# Altium PCB Ports.PcbDoc
Units mm, origin at the board's own origin, x right, y up, seen from the top; angles counter-clockwise.
Board outline 101.6 x 101.6 mm, 4 copper layers (Top Layer, 3.3V, GND, Bottom Layer), stack 0.603 mm thick; 14 components, 21 nets, 80 pads, 0 vias.
Unrouted connection lines stored in the file: 26.
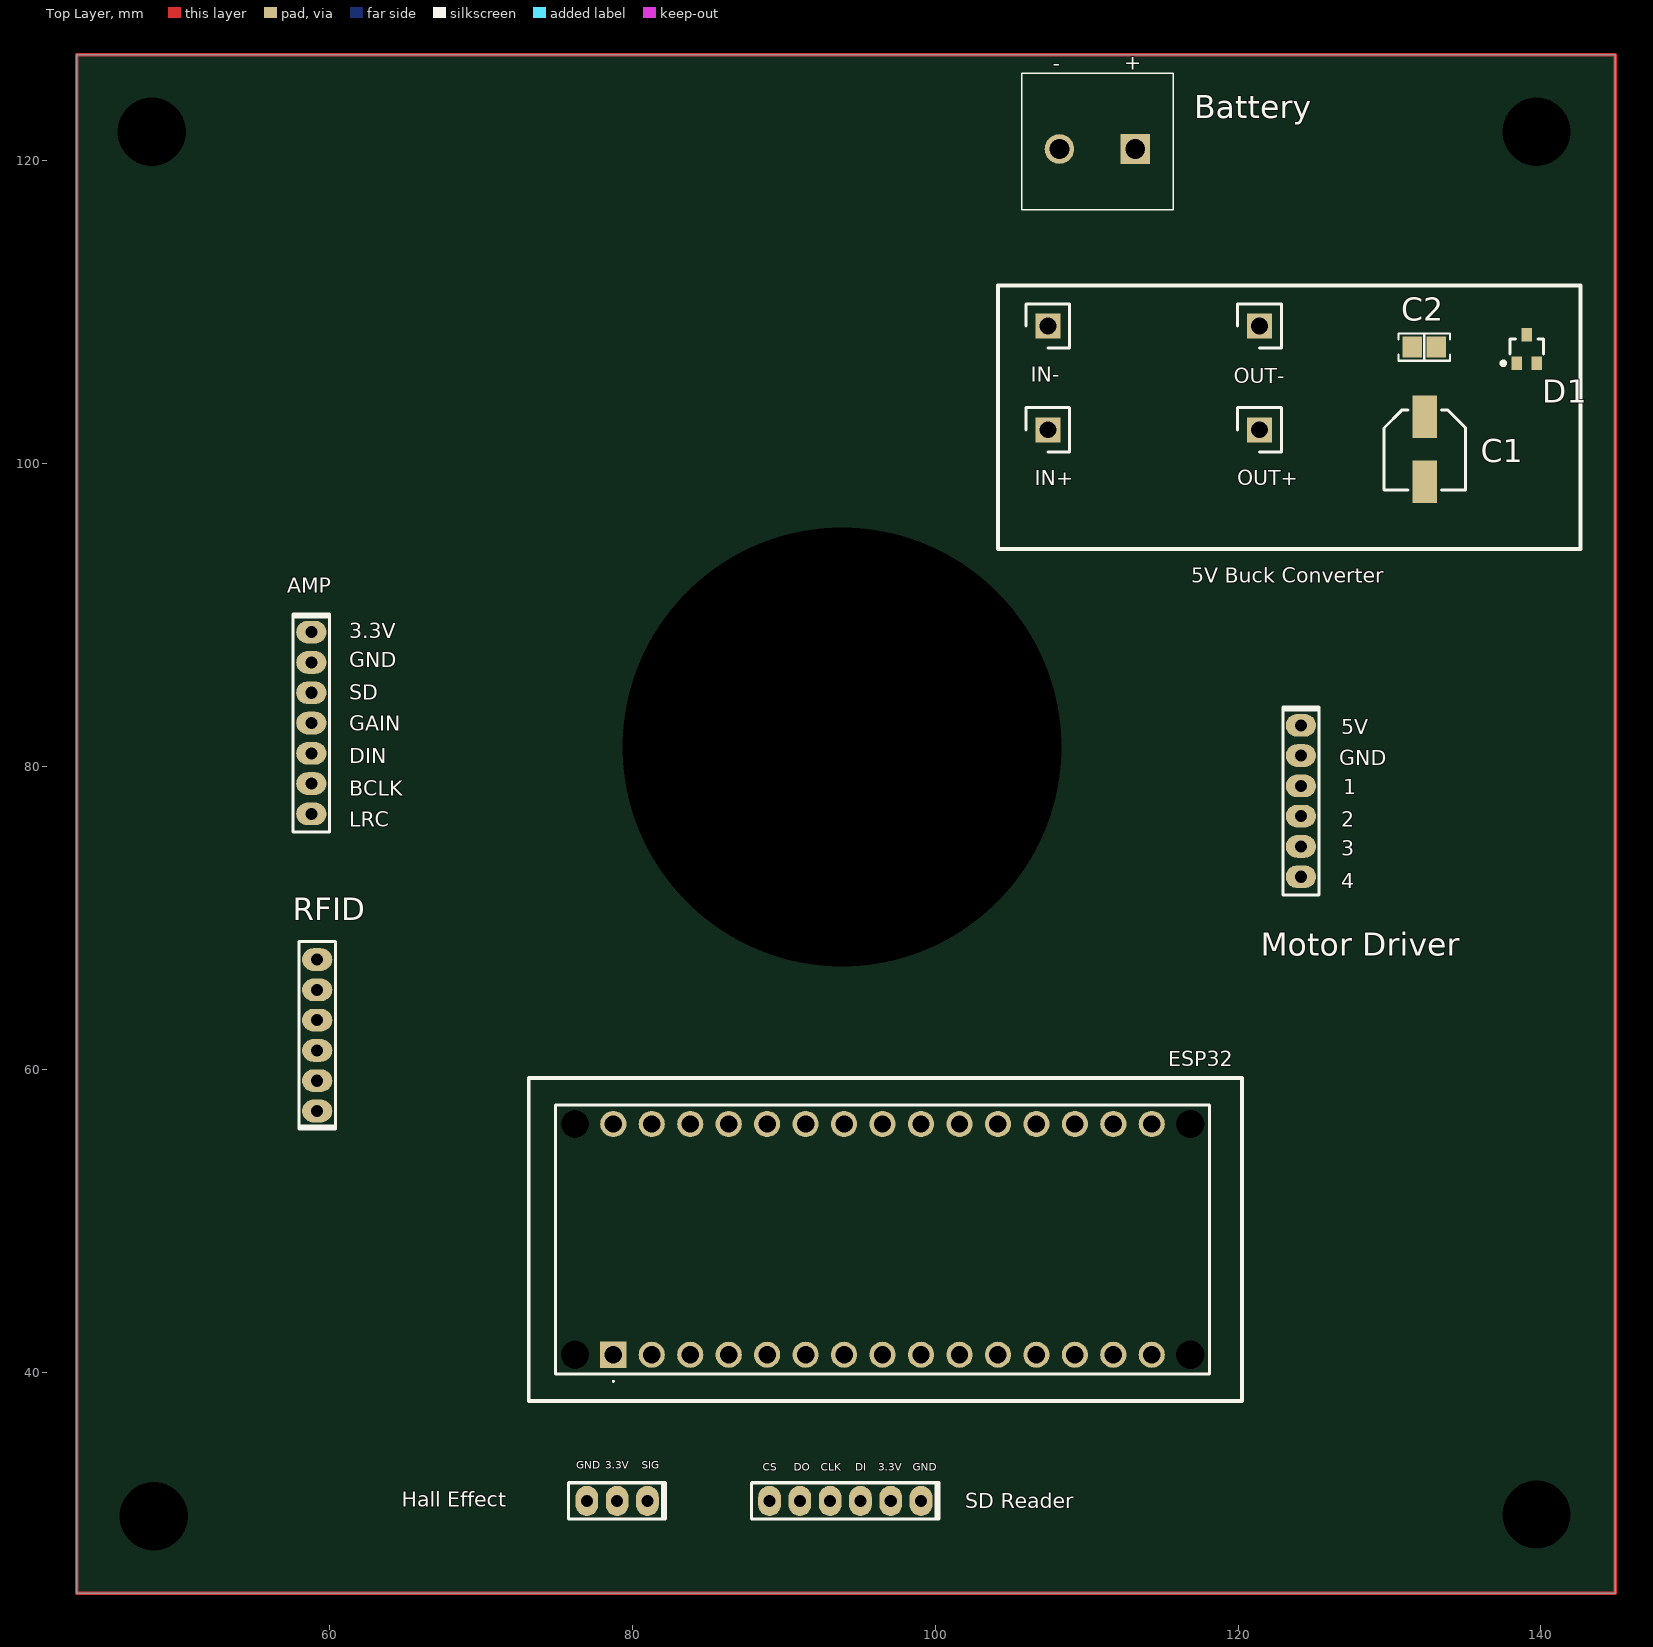
[diagram p0: Top Layer view]
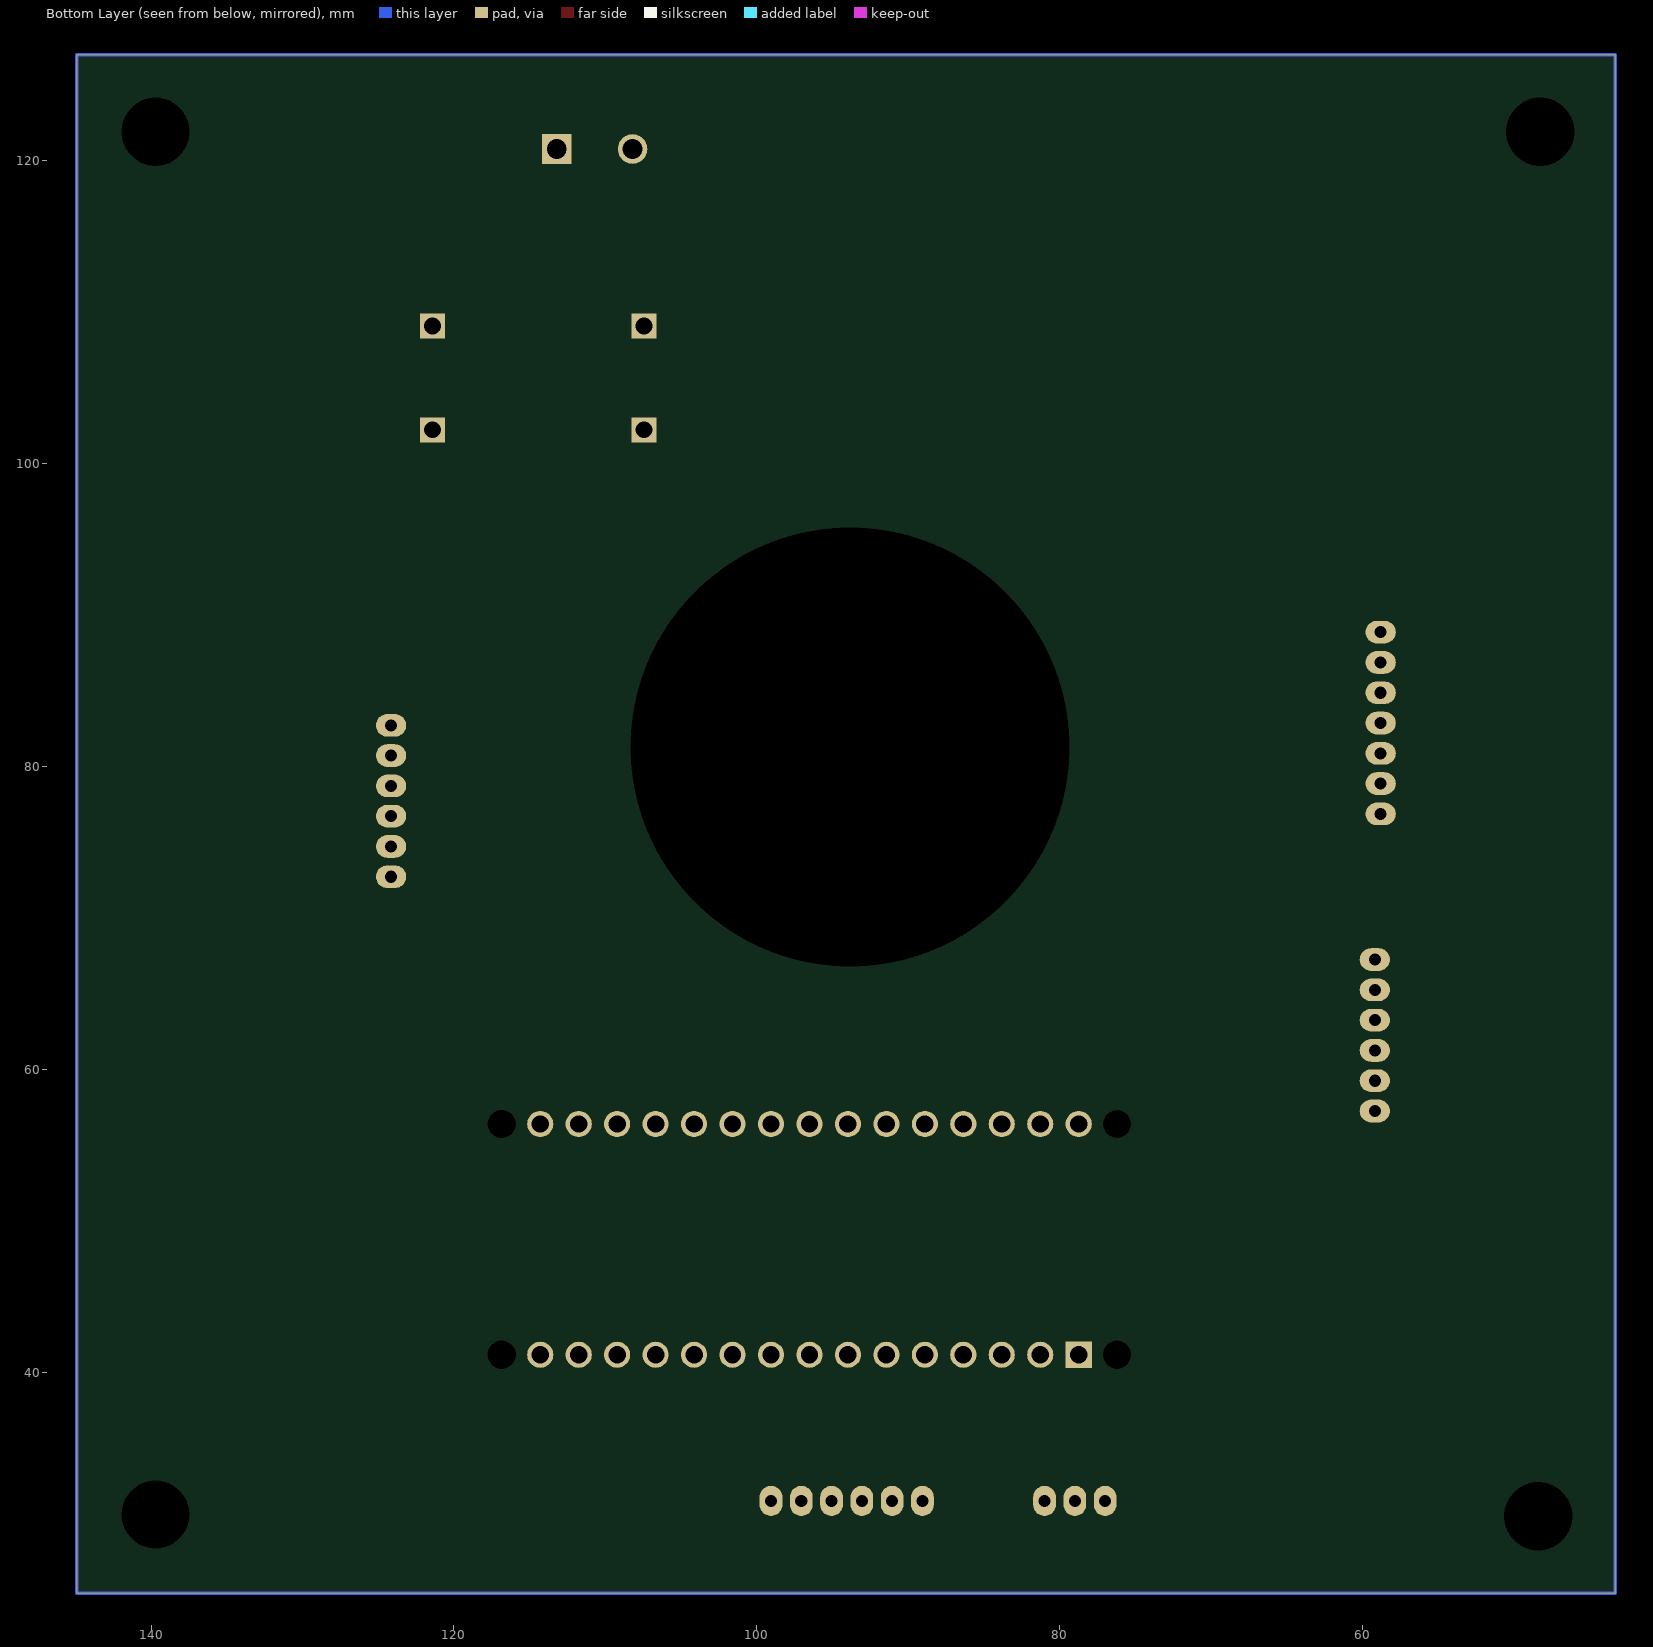
[diagram p1: Bottom Layer view, seen from below]
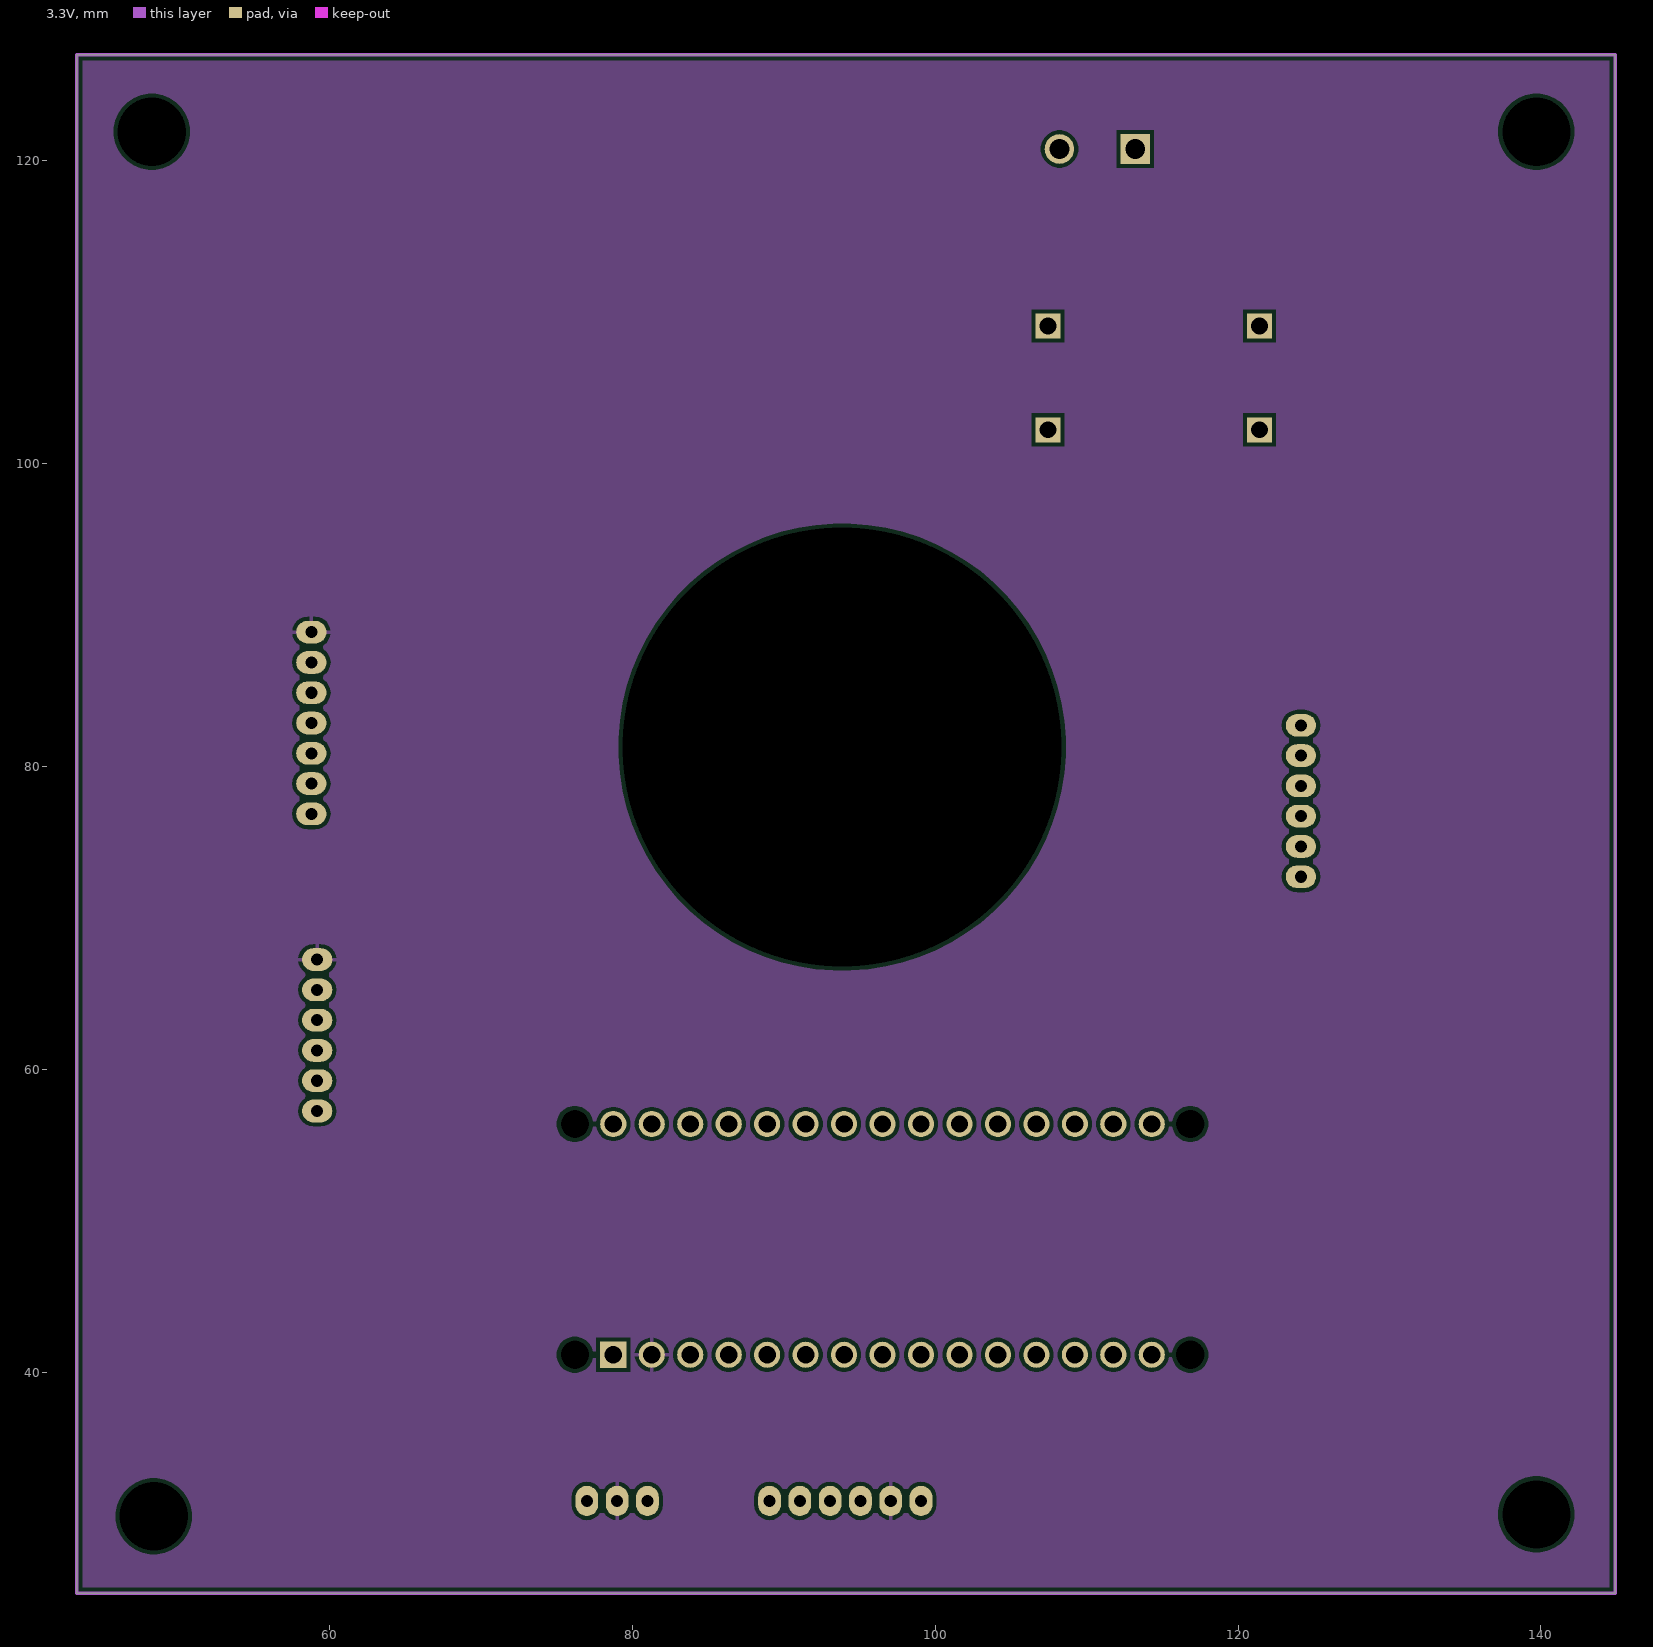
[diagram p2: 3.3V]
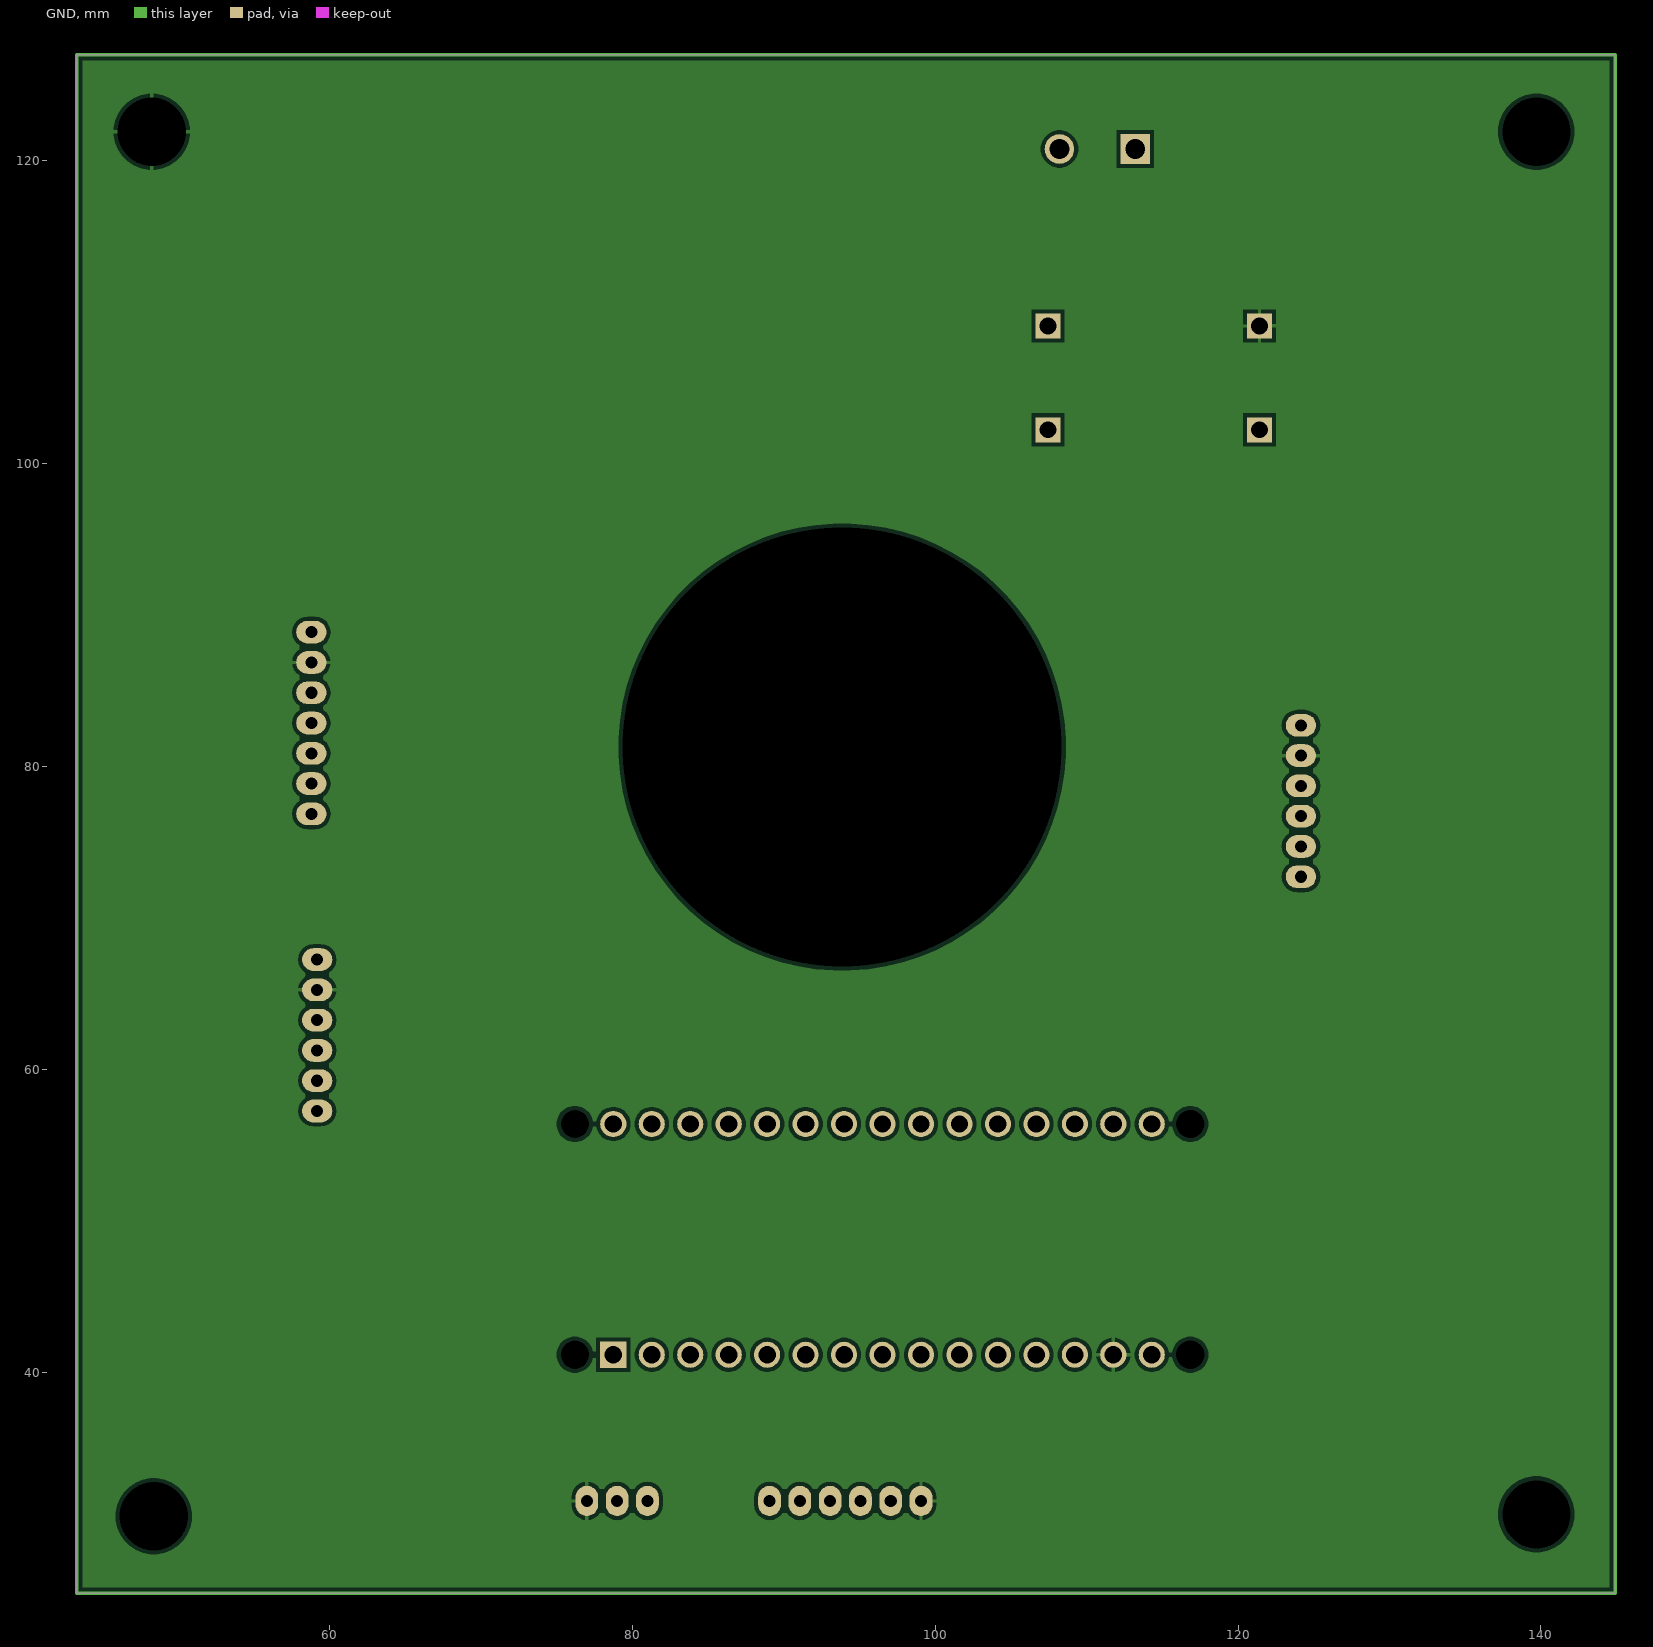
[diagram p3: GND]

## Layer stack, top to bottom
Top Solder: solder mask 0.0102, Solder Resist, Dk 3.5
Top Layer: signal copper 0.0356
Dielectric 2: prepreg 0.0711, PP-006, Dk 4.1
3.3V: signal copper 0.035
Dielectric 1: dielectric 0.32, FR-4, Dk 4.8
GND: signal copper 0.035
Dielectric 3: prepreg 0.0711, PP-006, Dk 4.1
Bottom Layer: signal copper 0.0356
Bottom Solder: solder mask 0.0102, Solder Resist, Dk 3.5

## Board outline
43.307,25.4 43.307,127 144.907,127 144.907,25.4

## Design rules (kind name [scope] priority, off if disabled: settings)
Clearance [All] p1: gap=0.254 ignorepadtopadclearanceinfootprint=FALSE
PolygonConnect [All] p1: connectstyle=Relief reliefconductorwidth=0.254 reliefentries=4 polygonreliefangle="90 Angle" airgapwidth=0.254
RoutingVias [All] p1: holewidth=0.711 width=1.27 viastyle="Through Hole" minholewidth=0.711 minwidth=1.27 maxholewidth=0.711 maxwidth=1.27
SolderMaskExpansion [All] p1: expansion=0 istentingtop=FALSE
Width [All] p1: maxlimit=0.254 minlimit=0.254 preferedwidth=0.254
30 further rules are at their usual default settings.

## Components (designator, comment, footprint, x,y, rotation, side; value= is the part's Value field where it differs from the comment)
AMP "NPPN071BFCN-RC" "SULLINS NPPN071BFCN" 58.801,82.868 r270 top
Battery "1935161" 1935161 113.204,120.777 r180 top
C1 "100 µF" "CAP ALSMD 5.3MM H5.4MM" 132.334,100.956 r270 top
C2 "0.1µF" "CAP 0805_2012" 132.296,107.696 r0 top
D1 "BZX84W-B6V2F" "DIODES SOT-323-3" 139.065,107.569 r90 top
ESP32 "ABX00083" ABX00083 78.74,41.148 r0 top
"Hall Effect" "NPPN031BFCN-RC" "SULLINS NPPN031BFCN" 78.994,31.496 r180 top
IN+ "PH1-01-UA" HDRV1W64P0X254_1X1_254X250X888P 107.442,102.235 r90 top
IN- "PH1-01-UA" HDRV1W64P0X254_1X1_254X250X888P 107.442,109.093 r90 top
"Motor Driver" "NPPN061BFCN-RC" "SULLINS NPPN061BFCN" 124.152,77.717 r270 top
OUT+ "PH1-01-UA" HDRV1W64P0X254_1X1_254X250X888P 121.412,102.235 r90 top
OUT- "PH1-01-UA" HDRV1W64P0X254_1X1_254X250X888P 121.412,109.093 r90 top
RFID "NPPN061BFCN-RC" "SULLINS NPPN061BFCN" 59.182,62.246 r90 top
"SD Reader" "NPPN061BFCN-RC" "SULLINS NPPN061BFCN" 94.06,31.496 r180 top

## Footprints (in the part's own frame and the unit in brackets; to place one, negate y for a bottom-side part, rotate by r counter-clockwise, add the part's x,y. Pads: shape width x height; smd on the part's side, far side on the other; paste and mask are expansions set on the pad)
1935161 [mm]
  rect 1.95x1.95 hole 1.3: 1(0,0)
  round 1.95 hole 1.3: 2(5,0)
  silkscreen extent -2.5,-5 7.5,4, body extent -2.64,-5 8.03,4, height 11.3
ABX00083 [mm]
  rect 1.725x1.725 hole 1.15: 1(0,0)
  round 1.725 hole 1.15: 2(2.54,0) 3(5.08,0) 4(7.62,0) 5(10.16,0) 6(12.7,0) 7(15.24,0) 8(17.78,0) 9(20.32,0) 10(22.86,0) 11(25.4,0) 12(27.94,0) 13(30.48,0) 14(33.02,0) 15(35.56,0) 16(35.56,15.24) 17(33.02,15.24) 18(30.48,15.24) 19(27.94,15.24) 20(25.4,15.24) 21(22.86,15.24) 22(20.32,15.24) 23(17.78,15.24) 24(15.24,15.24) 25(12.7,15.24) 26(10.16,15.24) 27(7.62,15.24) 28(5.08,15.24) 29(2.54,15.24) 30(0,15.24)
  round 0.93 hole 1.86 unplated: MH1(-2.54,0) MH2(38.1,0) MH3(38.1,15.24) MH4(-2.54,15.24)
  silkscreen extent -3.81,-1.8 39.37,16.51
"CAP 0805_2012" [mm] "Chip Capacitor, 2-Leads, Body 2.00x1.20mm, IPC Medium Density"
  rect 1.3x1.4 smd: 1(-0.8,0) 2(0.8,0)
  silkscreen extent -1.7,-0.9 1.7,0.9, body extent -1,-0.64 1,0.64, height 1.26
"CAP ALSMD 5.3MM H5.4MM" [mm] "Aluminum Electrolytic Capacitor, Body 5.30x5.30x5.40mm, IPC Low Density"
  rect 2.8x1.6 smd: 1(-2.15,0) 2(2.15,0)
  silkscreen extent -2.6,-2.7 2.7,2.7, body extent -2.95,-2.7 2.95,2.7, height 5.4
"DIODES SOT-323-3" [mm] "SOT323, 3-Leads, Body 2.00x2.10mm, Pitch 0.65mm, IPC Medium Density"
  rect 0.9x0.7 smd: 1(-0.95,0.65) 2(0.95,0) 3(-0.95,-0.65)
  silkscreen extent -1.07,-1.1 0.67,1.67, body extent -1.06,-1 1.06,1, height 1
HDRV1W64P0X254_1X1_254X250X888P [mm]
  rect 1.65x1.65 hole 1.1: 1(0,0)
  silkscreen extent -1.46,-1.44 1.46,1.44, body extent -1.27,-1.25 1.27,1.25, height 8.88
"SULLINS NPPN031BFCN" [mm]
  oval 1.5x2 hole 0.8: 1(-2,0) 2(0,0) 3(2,0)
  silkscreen extent -3.2,-1.2 3.2,1.2, body extent -3.25,-1.2 3.25,1.2, height 4.41
"SULLINS NPPN061BFCN" [mm]
  oval 1.5x2 hole 0.8: 1(-5,0) 2(-3,0) 3(-1,0) 4(1,0) 5(3,0) 6(5,0)
  silkscreen extent -6.2,-1.2 6.2,1.2, body extent -6.25,-1.2 6.25,1.2, height 4.41
"SULLINS NPPN071BFCN" [mm]
  oval 1.5x2 hole 0.8: 1(-6,0) 2(-4,0) 3(-2,0) 4(0,0) 5(2,0) 6(4,0) 7(6,0)
  silkscreen extent -7.2,-1.2 7.2,1.2, body extent -7.25,-1.2 7.25,1.2, height 4.41

## Part data
AMP: "CONN HDR 7POS 0.079 GOLD PCB", Current Rating (Amps)=2A, Insulation Color=Black, Manufacturer="Sullins Connector Solutions", Material Flammability Rating="UL94 V-0", Operating Temperature="-40°C ~ 105°C", Supplier Part Number 1=S5751-07-ND, ComponentLink1Description=Datasheet, ComponentLink1URL=https://drawings-pdf.s3.amazonaws.com/10483.pdf, ComponentLink2Description="DigiKey Link", ComponentLink2URL=https://www.digikey.com/en/products/detail/sullins-connector-solutions/NPPN071BFCN-RC/804809, Connector Type=Header, Contact Finish - Mating=Gold, Contact Finish - Post=Gold, Contact Finish Thickness - Mating=Flash, Contact Length - Post="0.094\" (2.40mm)", Contact Type="Female Socket", Fastening Type=Push-Pull, Insulation Height="0.173\" (4.40mm)", LastUpdated="6/21/2022 2:43:39 PM", Lifecycle Status=Active, Minimum Order=1, Mounting Type="Through Hole", Number of Positions=7, Number of Positions Loaded=All, Number of Rows=1, Packaging=Tube, Part Number=NPPN071BFCN-RC, Part Status=Active, Pitch - Mating="0.079\" (2.00mm)", Price=0.42, Series=-, Style="Board to Board", Supplier 1=DigiKey, Termination=Solder
Battery: "Connector", Manufacturer_Name="Phoenix Contact", Mouser Part Number=651-1935161, Arrow Part Number=1935161, Arrow Price/Stock=https://www.arrow.com/en/products/1935161/phoenix-contact?utm_currency=USD&region=nac, Datasheet Link=https://www.phoenixcontact.com/en-us/products/printed-circuit-board-terminal-pt-15-2-50-h-1935161?type=pdf, Height=11.55mm, Manufacturer_Part_Number=1935161, Mouser Price/Stock=https://www.mouser.co.uk/ProductDetail/Phoenix-Contact/1935161?qs=W3wJikR1%252BS6eKzfFl8Rbew%3D%3D
C1: library part 865090142005, "CAP ALUM 100UF 20% 6.3V SMD", Device Package="Radial, Can - SMD", Lifetime @ Temp.="1000 Hrs @ 85°C", Manufacturer="Würth Elektronik", Operating Temperature="-40°C ~ 85°C", Ripple Current @ High Frequency="105 mA @ 100 kHz", Ripple Current @ Low Frequency="70 mA @ 120 Hz", Supplier Part Number 1=732-8389-1-ND, Tolerance=±20%, Voltage - Rated="6.3 V", Applications="General Purpose", Capacitance="100 µF", ComponentLink1Description=Datasheet, ComponentLink1URL=https://katalog.we-online.de/pbs/datasheet/865090142005.pdf, ComponentLink2Description="DigiKey Link", ComponentLink2URL=https://www.digikey.com/en/products/detail/würth-elektronik/865090142005/5727984, Height - Seated (Max)="0.217\" (5.50mm)", LastUpdated="4/5/2026 8:30:07 PM", Lifecycle Status=Active, Minimum Order=1, Mounting Type="Surface Mount", Package / Case="Radial, Can - SMD", Packaging=TapeAndReel, Part Number=865090142005, Part Status=Active, partid=7916, Polarization=Polar, Price=0.13, Series=WCAP-ASLU, Size / Dimension="0.197\" Dia (5.00mm)", Supplier 1=DigiKey, Surface Mount Land Size="0.209\" L x 0.209\" W (5.30mm x 5.30mm)"
C2: library part 08056C104JAZ2A, "CAP CER 0.1UF 6.3V X7R 0805", Device Package="0805 (2012 Metric)", Manufacturer="AVX Corporation", Operating Temperature="-55°C ~ 125°C", Supplier Part Number 1=478-11914-1-ND, Temperature Coefficient=X7R, Tolerance=±5%, Voltage - Rated=6.3V, Applications="Boardflex Sensitive", Capacitance=0.1µF, ComponentLink1Description=Datasheet, ComponentLink1URL=http://datasheets.avx.com/FlexitermMLCC.pdf, ComponentLink2Description="DigiKey Link", ComponentLink2URL=http://digikey.com/product-detail/en/avx-corporation/08056C104JAZ2A/478-11914-1-ND/8573550, Features="Soft Termination", LastUpdated="9/2/2020 1:04:11 AM", Lifecycle Status=Active, Minimum Order=1, Mounting Type="Surface Mount, MLCC", Package / Case="0805 (2012 Metric)", Packaging=TapeAndReel, Part Number=08056C104JAZ2A, Part Status=Active, partid=16783, Price=0.08, Series=FLEXITERM®, Size / Dimension="0.079\" L x 0.049\" W (2.01mm x 1.25mm)", Supplier 1=DigiKey
D1: "DIODE ZENER 6.2V 275MW SOT323", Current - Reverse Leakage @ Vr="3 µA @ 4 V", Manufacturer="Nexperia USA Inc.", Operating Temperature="150°C (TJ)", Package / Case="SC-70, SOT-323", Power - Max="275 mW", Supplier Device Package=SOT-323, Supplier Part Number 1=1727-8280-1-ND, Tolerance=±2%, Voltage - Forward (Vf) (Max) @ If="900 mV @ 10 mA", Voltage - Zener (Nom) (Vz)="6.2 V", ComponentLink1Description=Datasheet, ComponentLink1URL=https://assets.nexperia.com/documents/data-sheet/BZX84W_SER.pdf, ComponentLink2Description="DigiKey Link", ComponentLink2URL=https://www.digikey.com/en/products/detail/nexperia-usa-inc/BZX84W-B6V2F/9380695, Impedance (Max) (Zzt)="10 Ohms", LastUpdated="4/5/2026 8:40:51 PM", Lifecycle Status=Active, Minimum Order=1, Mounting Type="Surface Mount", Packaging=TapeAndReel, Part Number=BZX84W-B6V2F, Part Status=Active, partid=809, Price=0.02, Series=BZX84W, Supplier 1=DigiKey
ESP32: "Integrated Circuit", Manufacturer_Name=Arduino, Mouser Part Number=782-ABX00083, Arrow Part Number=ABX00083, Arrow Price/Stock=https://www.arrow.com/en/products/abx00083/arduino-corporation.html?utm_currency=USD&region=nac, Datasheet Link=https://docs.arduino.cc/resources/datasheets/ABX00083-datasheet.pdf, Manufacturer_Part_Number=ABX00083, Mouser Price/Stock=https://www.mouser.co.uk/ProductDetail/Arduino/ABX00083?qs=ulEaXIWI0c8OkA6u7pnNRA%3D%3D
"Hall Effect": "CONN HDR 3POS 0.079 GOLD PCB", Current Rating (Amps)=2A, Insulation Color=Black, Manufacturer="Sullins Connector Solutions", Material Flammability Rating="UL94 V-0", Operating Temperature="-40°C ~ 105°C", Supplier Part Number 1=S5751-03-ND, ComponentLink1Description=Datasheet, ComponentLink1URL=https://drawings-pdf.s3.amazonaws.com/10483.pdf, ComponentLink2Description="DigiKey Link", ComponentLink2URL=https://www.digikey.com/en/products/detail/sullins-connector-solutions/NPPN031BFCN-RC/804805, Connector Type=Header, Contact Finish - Mating=Gold, Contact Finish - Post=Gold, Contact Finish Thickness - Mating=Flash, Contact Length - Post="0.094\" (2.40mm)", Contact Type="Female Socket", Fastening Type=Push-Pull, Insulation Height="0.173\" (4.40mm)", LastUpdated="6/21/2022 2:42:20 PM", Lifecycle Status=Active, Minimum Order=1, Mounting Type="Through Hole", Number of Positions=3, Number of Positions Loaded=All, Number of Rows=1, Packaging=Tube, Part Number=NPPN031BFCN-RC, Part Status=Active, Pitch - Mating="0.079\" (2.00mm)", Price=0.25, Series=-, Style="Board to Board", Supplier 1=DigiKey, Termination=Solder
IN+ IN- OUT+ OUT-: "Connector", Manufacturer_Name="Adam Tech", Mouser Part Number=737-PH1-01-UA, Arrow Part Number=PH1-01-UA, Arrow Price/Stock=https://www.arrow.com/en/products/ph1-01-ua/adam-tech?utm_currency=USD&region=nac, Datasheet Link=https://app.adam-tech.com/products/download/data_sheet/201605/ph1-xx-ua-data-sheet.pdf, Height=8.881mm, Manufacturer_Part_Number=PH1-01-UA, Mouser Price/Stock=https://www.mouser.co.uk/ProductDetail/Adam-Tech/PH1-01-UA?qs=HoCaDK9Nz5d5oFPj3mhtaw%3D%3D
"Motor Driver" RFID "SD Reader": "CONN HDR 6POS 0.079 GOLD PCB", Current Rating (Amps)=2A, Insulation Color=Black, Manufacturer="Sullins Connector Solutions", Material Flammability Rating="UL94 V-0", Operating Temperature="-40°C ~ 105°C", Supplier Part Number 1=S5751-06-ND, ComponentLink1Description=Datasheet, ComponentLink1URL=https://drawings-pdf.s3.amazonaws.com/10483.pdf, ComponentLink2Description="DigiKey Link", ComponentLink2URL=https://www.digikey.com/en/products/detail/sullins-connector-solutions/NPPN061BFCN-RC/804808, Connector Type=Header, Contact Finish - Mating=Gold, Contact Finish - Post=Gold, Contact Finish Thickness - Mating=Flash, Contact Length - Post="0.094\" (2.40mm)", Contact Type="Female Socket", Fastening Type=Push-Pull, Insulation Height="0.173\" (4.40mm)", LastUpdated="6/21/2022 2:43:22 PM", Lifecycle Status=Active, Minimum Order=1, Mounting Type="Through Hole", Number of Positions=6, Number of Positions Loaded=All, Number of Rows=1, Packaging=Tube, Part Number=NPPN061BFCN-RC, Part Status=Active, Pitch - Mating="0.079\" (2.00mm)", Price=0.40, Series=-, Style="Board to Board", Supplier 1=DigiKey, Termination=Solder

## Free pads (board coordinates)
  round 1.524 hole 4.5 unplated: 2(48.26,121.92) 2(48.387,30.48) 2(139.7,30.607) 2(139.7,121.92)
  round 1.524 hole 29 unplated: 2(93.853,81.28)

## Nets (pads, with @x,y where several pads share a name; then routed paths per layer and width w, separated by ;. In a path a pad name is that pad's centre, name@x,y a point inside that pad or via, vN(x,y) a via of type N, cw(c..) or ccw(c..) an arc to the next point about the centre after c; other vN are vias at no path point)
3.3V: "Hall Effect.2" "SD Reader.2" AMP.1 ESP32.2 RFID.6
GND: "Hall Effect.3" "Motor Driver.2" "SD Reader.1" AMP.2 C1.2 C2.2 D1.1 ESP32.14 OUT-.1 pad.2@48.26,121.92 RFID.5
NetAMP_5: AMP.5 ESP32.20
NetAMP_6: AMP.6 ESP32.26
NetAMP_7: AMP.7 ESP32.27
NetBattery_1: Battery.1 ESP32.15 IN+.1
NetBattery_2: Battery.2 IN-.1
NetC1_1: "Motor Driver.1" C1.1 C2.1 D1.2 OUT+.1
NetESP32_1: ESP32.1 RFID.1
NetESP32_4: "Hall Effect.1" ESP32.4
NetESP32_5: "SD Reader.6" ESP32.5
NetESP32_6: "SD Reader.5" ESP32.6
NetESP32_7: "SD Reader.4" ESP32.7
NetESP32_8: "SD Reader.3" ESP32.8
NetESP32_21: "Motor Driver.6" ESP32.21
NetESP32_22: "Motor Driver.5" ESP32.22
NetESP32_23: "Motor Driver.4" ESP32.23
NetESP32_24: "Motor Driver.3" ESP32.24
NetESP32_28: ESP32.28 RFID.4
NetESP32_29: ESP32.29 RFID.3
NetESP32_30: ESP32.30 RFID.2
pads on no net: AMP.3 AMP.4 D1.3 ESP32.3 ESP32.9 ESP32.10 ESP32.11 ESP32.12 ESP32.13 ESP32.16 ESP32.17 ESP32.18 ESP32.19 ESP32.25 ESP32.MH1 ESP32.MH2 ESP32.MH3 ESP32.MH4

## Polygon pours and split planes (outlines as drawn)
3.3V on 3.3V "3.3V_L02_P004" (solid, remove dead copper, pour order 4): 43.561,127.127 144.78,127.127 144.907,127 144.907,25.4 43.307,25.4
GND on GND "GND_L03_P003" (solid, pour order 3): 43.307,127 144.907,127 144.907,25.4 43.307,25.4

## Other copper
Multi-Layer:
  the board outline again, w0.254

## Silkscreen, mask and mechanical layers (free items; w line width, h text height)
Top Overlay:
  lines w0.254: 73.152,38.1 73.152,59.436 120.269,59.436 120.269,38.1 73.152,38.1 ; 104.14,94.361 142.621,94.361 142.621,111.76 104.14,111.76 104.14,94.361
  text "+" at 112.468,126.017 h1
  text "-" at 107.769,125.938 h1
  text "5V Buck Converter" at 116.913,92.148 h1
  text "3.3V" at 61.287,88.465 h1
  text "GND" at 61.287,86.56 h1
  text "SD" at 61.287,84.401 h1
  text "GAIN" at 61.287,82.369 h1
  text "5V" at 126.819,82.115 h1
  text "DIN" at 61.287,80.21 h1
  text "GND" at 126.692,80.083 h1
  text "1" at 126.946,78.178 h1
  text "BCLK" at 61.287,78.051 h1
  text "LRC" at 61.287,76.019 h1
  text "2" at 126.819,76.019 h1
  text "3" at 126.819,74.114 h1
  text "4" at 126.819,71.955 h1
  text "GND" at 76.3,33.628 h0.5
  text "3.3V" at 78.205,33.628 h0.5
  text "SIG" at 80.618,33.628 h0.5
  text "CS" at 88.619,33.501 h0.5
  text "DO" at 90.651,33.501 h0.5
  text "CLK" at 92.429,33.501 h0.5
  text "DI" at 94.715,33.501 h0.5
  text "3.3V" at 96.239,33.501 h0.5
  text "GND" at 98.525,33.501 h0.5